# Altium PCB main_board.PcbDoc (part 2 of 3)
Units mil, origin at the board's own origin, x right, y up, seen from the top; angles counter-clockwise.
Board outline 11417.32 x 7421.26 mil, 2 copper layers (Top Layer, Bottom Layer); 177 components, 88 nets, 592 pads, 139 vias.
Unrouted connection lines stored in the file: 154.
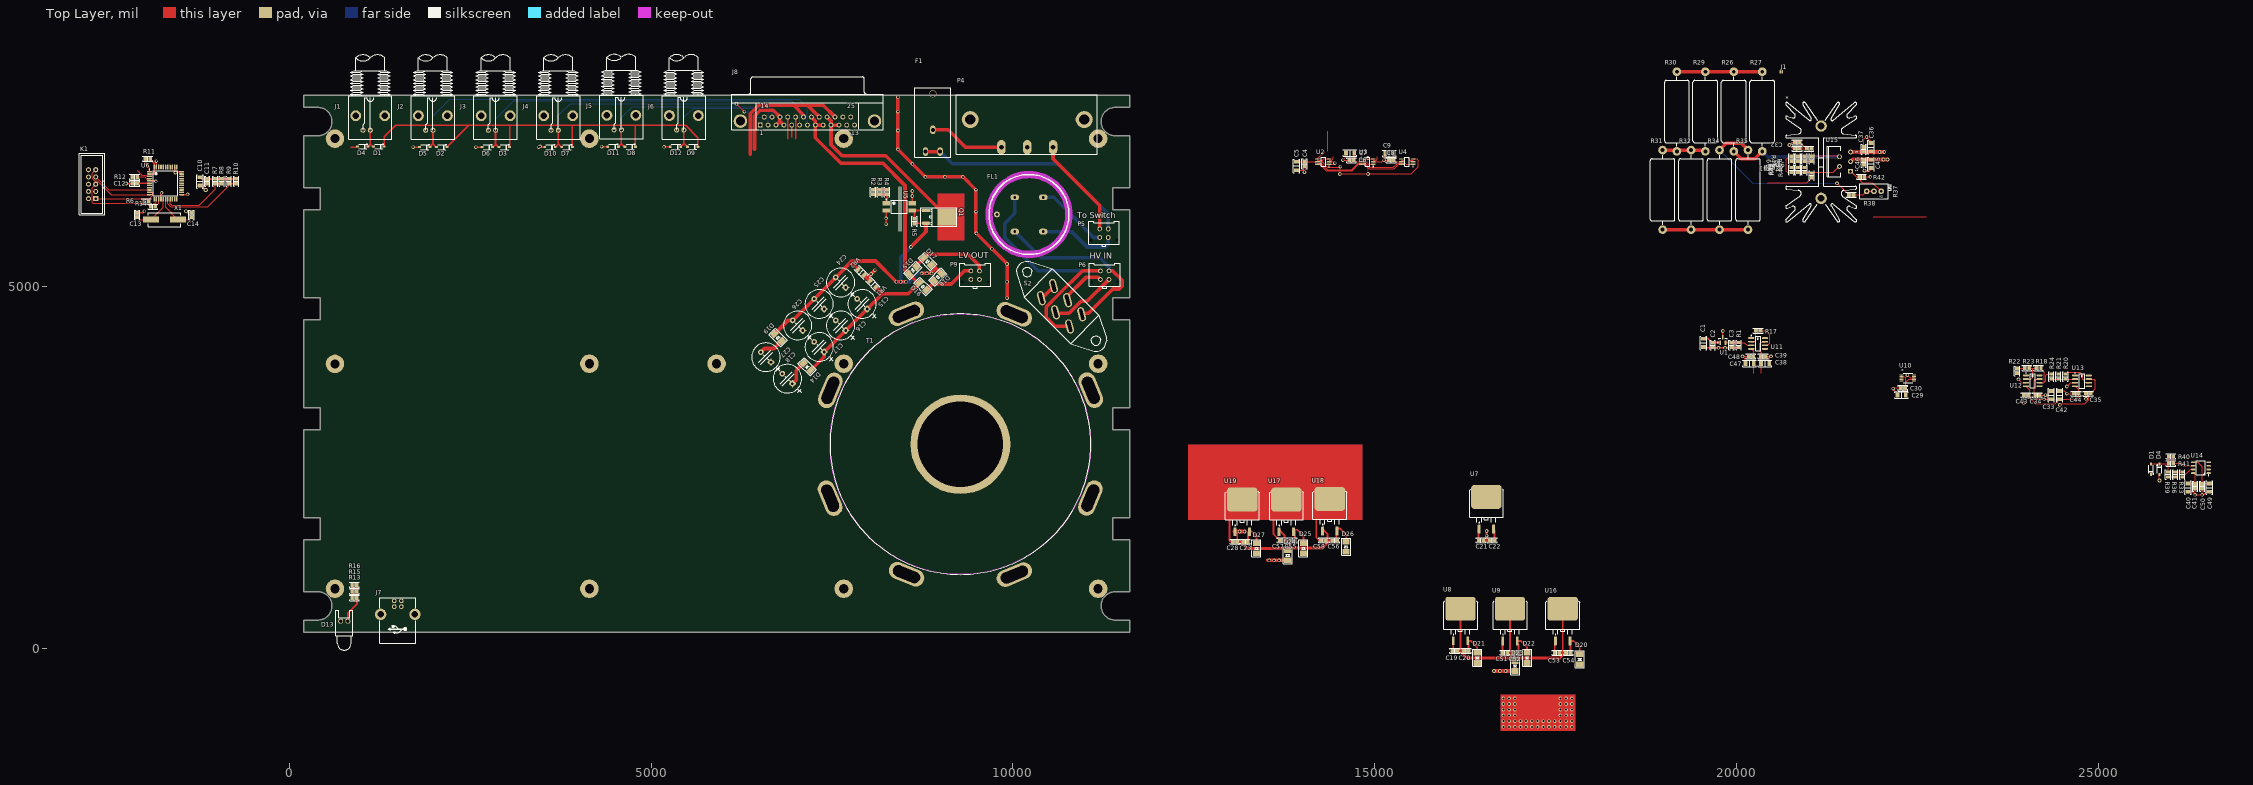
[diagram p0: Top Layer view]

## Part data (continued)
T1: Manufacturer=MULTICOMP, Manufacturer Part Number=MCTA060/12, Supplier Part Number 1=9530428, ComponentLink1Description=http://www.farnell.com/cad/1906782.pdf, ComponentLink1URL=http://www.farnell.com/cad/1906782.pdf, ComponentLink2Description=http://www.farnell.com/datasheets/1829278.pdf, ComponentLink2URL=http://www.farnell.com/datasheets/1829278.pdf, Corrente Nom Secondario=2.5, Diametro Esterno=91.5, Gamma Prodotti="MCTA Series", Livello di Corrente=2.5, Livello di Potenza=60, Lunghezza/Altezza Esterna=39, Montaggio Trasformatore=Pannello, Potenza Secondario="30VA<!--FANDB--><div class=\"features-and-benefits-container\"><div class=\"features-and-benefits-description\"><span class=\"features-benefits-value\">The Multicomp MCTA series are general purpose toroidal transformers with flying leads. They feature dual primary and dual secondary windings.</span></div><div class=\"features-and-benefits-list\"><ul class=\"features-and-benefits-list-list\"><li class=\"features-and-benefits-list-item\">Power rating ranges from 15VA to 1000VA</li><li class=\"features-and-benefits-list-item\">Secondary voltages ranges from 2 x 6VAC to 2 x 55VAC</li><li class=\"features-and-benefits-list-item\">Dual primary winding for connection in series or parallel only</li><li class=\"features-and-benefits-list-item\">Secondary windings can be connected in series or parallel or used independently</li><li class=\"features-and-benefits-list-item\">Double insulated primary lead-out</li><li class=\"features-and-benefits-list-item\">Flexible lead-out can be trimmed to any length without the need for removal of enamel</li><li class=\"features-and-benefits-list-item\">100% electrical and flash tested</li></ul></div><div class=\"features-and-benefits-contents\"><span class=\"features-and-benefits-value\">Transformer, Dished mounting plate, 2 foam pads, Screw, Nut and Washer.</span></div><div class=\"features-and-benefits-applications\"><ul class=\"features-and-benefits-value\"><li class=\"features-and-benefits-list-item\">Industriale</li><li class=\"features-and-benefits-list-item\">Gestione Alimentazione </li></ul></div></div>", Pricing 1="1=13.68, 5=12.94, 20=12.17, 60=11.86, 200=11.55 (EUR)", RoHS=YES, Sostanze Estremamente Preoccupanti (SVHC)="No SVHC (20-Jun-2016)", Stock 1=111, Supplier 1=Farnell, Tensioni Secondarie="2 x 12"
U1: library part REF3025AIDBZR, "Voltage reference, 2.5V", Manufacturer="Texas Instruments", Maximum Operating Temperature="+ 125 C", Minimum Operating Temperature="- 40 C", Operating Supply Current="42 uA", Operating Temperature Range="- 40 C to + 125 C", Output voltage="2.5 V", Package / Case=SOT-23-3, Series VREF - Input Voltage - Max="5.5 V", Shunt Current - Max="25 mA", Supplier Part Number 1=595-REF3025AIDBZR, Supply Current - Max="50 uA", Temperature coefficient="50 PPM / C", Accuracy="100 uV/mA", Brand="Texas Instruments", Category="Voltage References", Height="1 mm", Initial Accuracy="0.2 %", Length="2.92 mm", Manufacturer Part Number=REF3025AIDBZR, Minimum Order Quantity=1, Mounting Style=SMD/SMT, Packaging=Reel, Pricing 1="1=1.29, 10=1.15, 25=1.06, 50=0.950, 100=0.900, 250=0.841, 500=0.743, 1000=0.508, 3000=0.508 (EUR)", Product="Voltage References", Reeling=True, Reference Type="Series References", RoHS="RoHS Compliant", RoHS - Mouser=Y, Series=REF3025, Standard Pack Qty=3000, Stock 1=2808, Supplier 1=Mouser, Topology="Series References", Width="1.3 mm"
U2 U3 U4: library part ADS1115IDGSR, "16-Bit 4 channel ADC with PGA and reference", Analog Supply Voltage="2 V to 5.5 V", Manufacturer="Texas Instruments", Maximum Operating Temperature="+ 125 C", Minimum Operating Temperature="- 40 C", Package / Case=VSSOP-10, Pd - Power Dissipation="900 uW", Supplier Part Number 1=595-ADS1115IDGSR, Architecture=Sigma-Delta, Brand="Texas Instruments", Category="Analog to Digital Converters - ADC", Digital Supply Voltage="2 V to 5.5 V", Features="PGA, Oscillator, Internal Reference, Comparator", Height="1.02 mm", INL - Integral Nonlinearity="1 LSB", Input Type=Differential/Single-Ended, Interface Type="Serial, 2-Wire, I2C", Length="3 mm", Manufacturer Part Number=ADS1115IDGSR, Minimum Order Quantity=1, Mounting Style=SMD/SMT, Number of channels="2 Channel/4 Channel", Number of Converters="1 Converter", Operating Supply Voltage="2 V to 5.5 V", Packaging=Reel, Pricing 1="1=4.96, 10=4.45, 25=4.15, 50=3.93, 100=3.65, 250=3.47, 500=3.10, 1000=2.43, 2500=2.43 (EUR)", Product="Analog to Digital Converters", Reeling=True, Reference Type=Internal, Resolution="16 bit", RoHS="RoHS Compliant", RoHS - Mouser=Y, Sampling Rate="860 S/s", Series=ADS1115, Shutdown=Shutdown, Standard Pack Qty=2500, Stock 1=6215, Supplier 1=Mouser, Type="Precision ADC", Width="3 mm"
U5: library part Optoisolator1, "4-Pin Phototransistor Optocoupler", Case="Gull wing 4", Collector-emitter voltage=35V, Insulation voltage=5kV, Manufacturer=LITEON, Manufacturer Part Number=LTV-817S, Category="Optocouplers - Analog Output", ComponentLink1Description=http://static.tme.eu/products_pics/6/f/5/6f53ad03154050309bf911a8cef2b774/437233.jpg, ComponentLink1URL=http://static.tme.eu/products_pics/6/f/5/6f53ad03154050309bf911a8cef2b774/437233.jpg, CTR@If=50-600%@5mA, DatasheetVersion=Nov-2003, LatestRevisionDate=04-Mar-2005, LatestRevisionNote="Sch pins 3 & 4 Swapped.", MinAmount=5, Mounting=SMD, Multiples=1, Number of channels=1, Output type=transistor, PackageReference=DIP-4, Price Type=NET, Pricing 1="5=0.0986, 10=0.0883, 25=0.0813, 250=0.0715 (EUR)", Published=24-Mar-1999, Publisher="Altium Limited", Stock 1=45338, SuppliedAmount=0, Supplier 1=TME, Supplier Part Number 1=LTV-817S, Type of semiconductor component=optocoupler, Unit=pcs, Weight=0.211
U6: library part ATmega32U4-AU, "8-bit AVR MCU, 16MHz, 32KB Flash, 1KB EEPROM, 2.5KB SRAM, USB", Case=TQFP44, EEPROM memory capacity=1024B, Flash memory capacity=32kB, Manufacturer=ATMEL, Manufacturer Part Number=ATMEGA32U4-AU, Operating frequency=16MHz, Operating temperature=-40...85°C, Operating voltage=2.7...5.5V, SRAM memory capacity=2.5kB, Category="AVR SMD Atmel Microcontrollers", ComponentLink1Description="Manufacturer URL", ComponentLink1URL=http://www.atmel.com/, ComponentLink2Description="ATmega16U4/32U4 Datasheet", ComponentLink2URL=http://www.atmel.com/dyn/resources/prod_documents/doc7766.pdf, ComponentLink3Description="ATmega16U4 ATmega32U4 Summary", ComponentLink3URL=http://www.atmel.com/dyn/resources/prod_documents/7766S.pdf, ComponentLink4Description=http://static.tme.eu/products_pics/7/e/5/7e5fe201da234286f181b9f1c9938460/285537.jpg, ComponentLink4URL=http://static.tme.eu/products_pics/7/e/5/7e5fe201da234286f181b9f1c9938460/285537.jpg, DatasheetVersion="revF, Nov-2010", Integrated circuits features="Integrated Temp Sensor", Integrated circuit type="AVR microcontroller", Interface=UART, MinAmount=1, Mounting=SMD, Multiples=1, Number of 8bit timers=1, Number of 10bit A/D converters=12, Number of 16bit timers=2, Number of comparators=1, Number of external interrupts=13, Number of input capture channels=2, Number of output compare channels=12, Number of PWM channels=8, PackageDescription="44-Pin Plastic Thin Quad Flat Pack, 10 x 10 x 1.0 mm Body, 0.8 mm Pitch (TQFP)", PackageReference=44ML, PackageVersion="rev.G, Jul-2007", Price Type=NET, Pricing 1="1=5.78, 3=5.64, 10=5.01, 25=4.38, 100=3.92 (EUR)", Stock 1=134, SuppliedAmount=0, Supplier 1=TME, Supplier Part Number 1=ATMEGA32U4-AU, Supply voltage=2.7...5.5V, Unit=pcs, USB speed="Full Speed", Weight=1.664
U7: library part L7805-TO220, "Voltage regulator, 5V", Case=D2PAK, Kind of voltage regulator=fixed, Manufacturer="ON SEMICONDUCTOR", Manufacturer Part Number=MC7805ACD2TG, Output current=1A, Output voltage=5V, Package type=tube, Category="Unregulated Voltage Regulators", ComponentLink1Description=http://static.tme.eu/products_pics/e/a/8/ea8bf400c57f85e1fa510dcd027ce484/59301.jpg, ComponentLink1URL=http://static.tme.eu/products_pics/e/a/8/ea8bf400c57f85e1fa510dcd027ce484/59301.jpg, Integrated circuit type="voltage stabiliser", MinAmount=2, Mounting=SMD, Multiples=1, Price Type=NET, Pricing 1="2=0.45, 10=0.42, 50=0.38, 250=0.322 (EUR)", Stock 1=245, SuppliedAmount=0, Supplier 1=TME, Supplier Part Number 1=MC7805ACD2TG, Unit=pcs, Weight=2.18
U8 U9 U16: library part L7815-TO220, "Voltage regulator, 15V", Case=D2PAK, Kind of voltage regulator=fixed, Manufacturer="ON SEMICONDUCTOR", Manufacturer Part Number=MC7812ACD2TG, Output current=1A, Output voltage=12V, Package type=tube, Category="Unregulated Voltage Regulators", ComponentLink1Description=http://static.tme.eu/products_pics/e/a/8/ea8bf400c57f85e1fa510dcd027ce484/59301.jpg, ComponentLink1URL=http://static.tme.eu/products_pics/e/a/8/ea8bf400c57f85e1fa510dcd027ce484/59301.jpg, Integrated circuit type="voltage stabiliser", MinAmount=1, Mounting=SMD, Multiples=1, Price Type=NET, Pricing 1="1=0.5, 5=0.449, 25=0.41, 100=0.357, 500=0.299 (EUR)", Stock 1=415, SuppliedAmount=0, Supplier 1=TME, Supplier Part Number 1=MC7812ACD2TG, Unit=pcs, Weight=1.997
U10: library part MAX5805AAUB+, "Imported", Manufacturer="Maxim Integrated", Manufacturer Part Number=MAX5805BAUB+, Maximum Operating Temperature="+ 125 C", Minimum Operating Temperature="- 40 C", Package / Case=UMAX-10, Pd - Power Dissipation="707.3 mW", Reference Voltage="4.096 V", Supplier Part Number 1=700-MAX5805BAUB+, Supply Voltage - Max="5.5 V", Supply Voltage - Min="2.7 V", Brand="Maxim Integrated", C="Copyright (C) 2015 Accelerated Designs. All rights reserved", Category="Digital to Analog Converters - DAC", ComponentLink1Description=http://www.mouser.com/ds/2/256/MAX5803-MAX5805-472540.pdf, ComponentLink1URL=http://www.mouser.com/ds/2/256/MAX5803-MAX5805-472540.pdf, Copyright="Copyright (C) 2015 Accelerated Designs. All rights reserved", DNL - Differential Nonlinearity="+/- 0.2 LSB", Gain Error="0.5 %FS", INL - Integral Nonlinearity="+/- 0.5 LSB", Interface Type="Serial, I2C", Minimum Order Quantity=1, Mounting Style=SMD/SMT, Number of channels="1 Channel", Number of Converters="1 Converter", Output type="Voltage Buffered", Packaging=Tube, Pricing 1="1=1.26, 10=1.21 (EUR)", Product="Digital to Analog Converters", Reeling=False, RefDes=RefDes, Resolution="12 bit", RoHS="RoHS Compliant", RoHS - Mouser=Y, Series=MAX5805, Settling Time="6.3 us", Standard Pack Qty=50, Stock 1=323, Supplier 1=Mouser, Type=DEV, Vendor="Maxim Integrated Products"
U11 U12 U13: library part OP07CDR, "Low-Offset Voltage Operational Amplifier, 6 to 36 V, 0 to 70 degC, 8-pin SOIC (D8), Green (RoHS & no Sb/Br)", Case=SO8, Manufacturer="TEXAS INSTRUMENTS", Supply voltage="3...18V DC", Transmission band frequency=600kHz, Category="SMD Operational Amplifiers", ComponentLink1Description=http://static.tme.eu/products_pics/4/8/a/48a33ccfb5a851d5982dcdda0776f7ac/285338.jpg, ComponentLink1URL=http://static.tme.eu/products_pics/4/8/a/48a33ccfb5a851d5982dcdda0776f7ac/285338.jpg, Integrated circuit type="operational amplifier", Manufacturer Part Number=OP07CDR, MinAmount=3, Mounting=SMD, Multiples=1, Number of channels=1, Price Type=NET, Pricing 1="3=0.2668, 10=0.2451, 50=0.2177, 250=0.1848, 1000=0.165 (EUR)", Slew rate=0.3V/µs, Stock 1=2258, SuppliedAmount=0, Supplier 1=TME, Supplier Part Number 1=OP07CDR, Unit=pcs, Weight=0.23
U14: library part AD8226, "Instrumentation amplifier", Dual Supply Voltage="1.35 V to 18 V", Ib - Input Bias Current="35 nA", Manufacturer="Analog Devices", Manufacturer Part Number=AD8226ARMZ, Maximum Input Resistance="800 MOhms at +/- 15 V", Maximum Operating Temperature="+ 125 C", Minimum Operating Temperature="- 40 C", Operating Supply Current="325 uA", Operating Supply Voltage="2.2 V to 36 V", Package / Case=MSOP-8, Supplier Part Number 1=584-AD8226ARMZ, Supply Voltage - Max="36 V", Supply Voltage - Min="2.2 V", Voltage Gain dB="60 dB", Vos - Input Offset Voltage="100 uV", 3 dB Bandwidth="1.5 MHz", Amplifier Type="Instrumentation Amplifier", Brand="Analog Devices", Category="Instrumentation Amplifiers", CMRR - Common Mode Rejection Ratio="120 dB", ComponentLink1Description=http://www.mouser.com/ds/2/609/AD8226-877720.pdf, ComponentLink1URL=http://www.mouser.com/ds/2/609/AD8226-877720.pdf, Gain V/V="1 V/V to 1000 V/V", GBP - Gain Bandwidth Product=-, Height="0.85 mm", Length="3 mm", Minimum Order Quantity=1, Mounting Style=SMD/SMT, Number of channels="1 Channel", Packaging=Tube, Pricing 1="1=2.48, 10=2.22, 25=1.99, 50=1.87, 100=1.82, 250=1.64, 500=1.47, 1000=1.28 (EUR)", Product="Instrumentation Amplifiers", Reeling=False, RoHS="RoHS Compliant", RoHS - Mouser=Y, Series=AD8226, SR - Slew Rate="0.4 V/us", Standard Pack Qty=50, Stock 1=679, Supplier 1=Mouser, Supply Type="Single, Dual", Vcm - Common Mode Voltage="2.2 V to 36 V", Width="3 mm"
U15: library part lm675, Case=TO220-5, Manufacturer="TEXAS INSTRUMENTS", Manufacturer Part Number=LM675T/NOPB, Operating temperature=0...70°C, Supply voltage="16...60V DC", Transmission band frequency=5.5MHz, Category="THT Operational Amplifiers", ComponentLink1Description=http://static.tme.eu/products_pics/8/4/8/84875f56cd122364db0c84d2b63a2f07/59360.jpg, ComponentLink1URL=http://static.tme.eu/products_pics/8/4/8/84875f56cd122364db0c84d2b63a2f07/59360.jpg, Integrated circuit type="operational amplifier", MinAmount=1, Mounting=THT, Multiples=1, Number of channels=1, Price Type=NET, Pricing 1="1=4.39, 3=4.18, 10=3.64, 25=3.17 (EUR)", Slew rate=8V/µs, Stock 1=27, SuppliedAmount=0, Supplier 1=TME, Supplier Part Number 1=LM675T/NOPB, Unit=pcs, Weight=2.033
U17 U18 U19: library part L7915-TO220, "Voltage regulator-15.0V", Case=D2PAK, Kind of voltage regulator=fixed, Manufacturer="ON SEMICONDUCTOR", Manufacturer Part Number=MC7912ACD2TG, Output current=1A, Output voltage=-12V, Package type=tube, Category="Unregulated Voltage Regulators", ComponentLink1Description=http://static.tme.eu/products_pics/e/a/8/ea8bf400c57f85e1fa510dcd027ce484/59301.jpg, ComponentLink1URL=http://static.tme.eu/products_pics/e/a/8/ea8bf400c57f85e1fa510dcd027ce484/59301.jpg, Integrated circuit type="voltage stabiliser", MinAmount=1, Mounting=SMD, Multiples=1, Price Type=NET, Pricing 1="1=0.628, 5=0.56, 25=0.465, 100=0.39, 500=0.34 (EUR)", Stock 1=441, SuppliedAmount=0, Supplier 1=TME, Supplier Part Number 1=MC7912ACD2TG, Unit=pcs, Weight=1.876